# Allegro board autohood_teamschematic_v3.4.brd
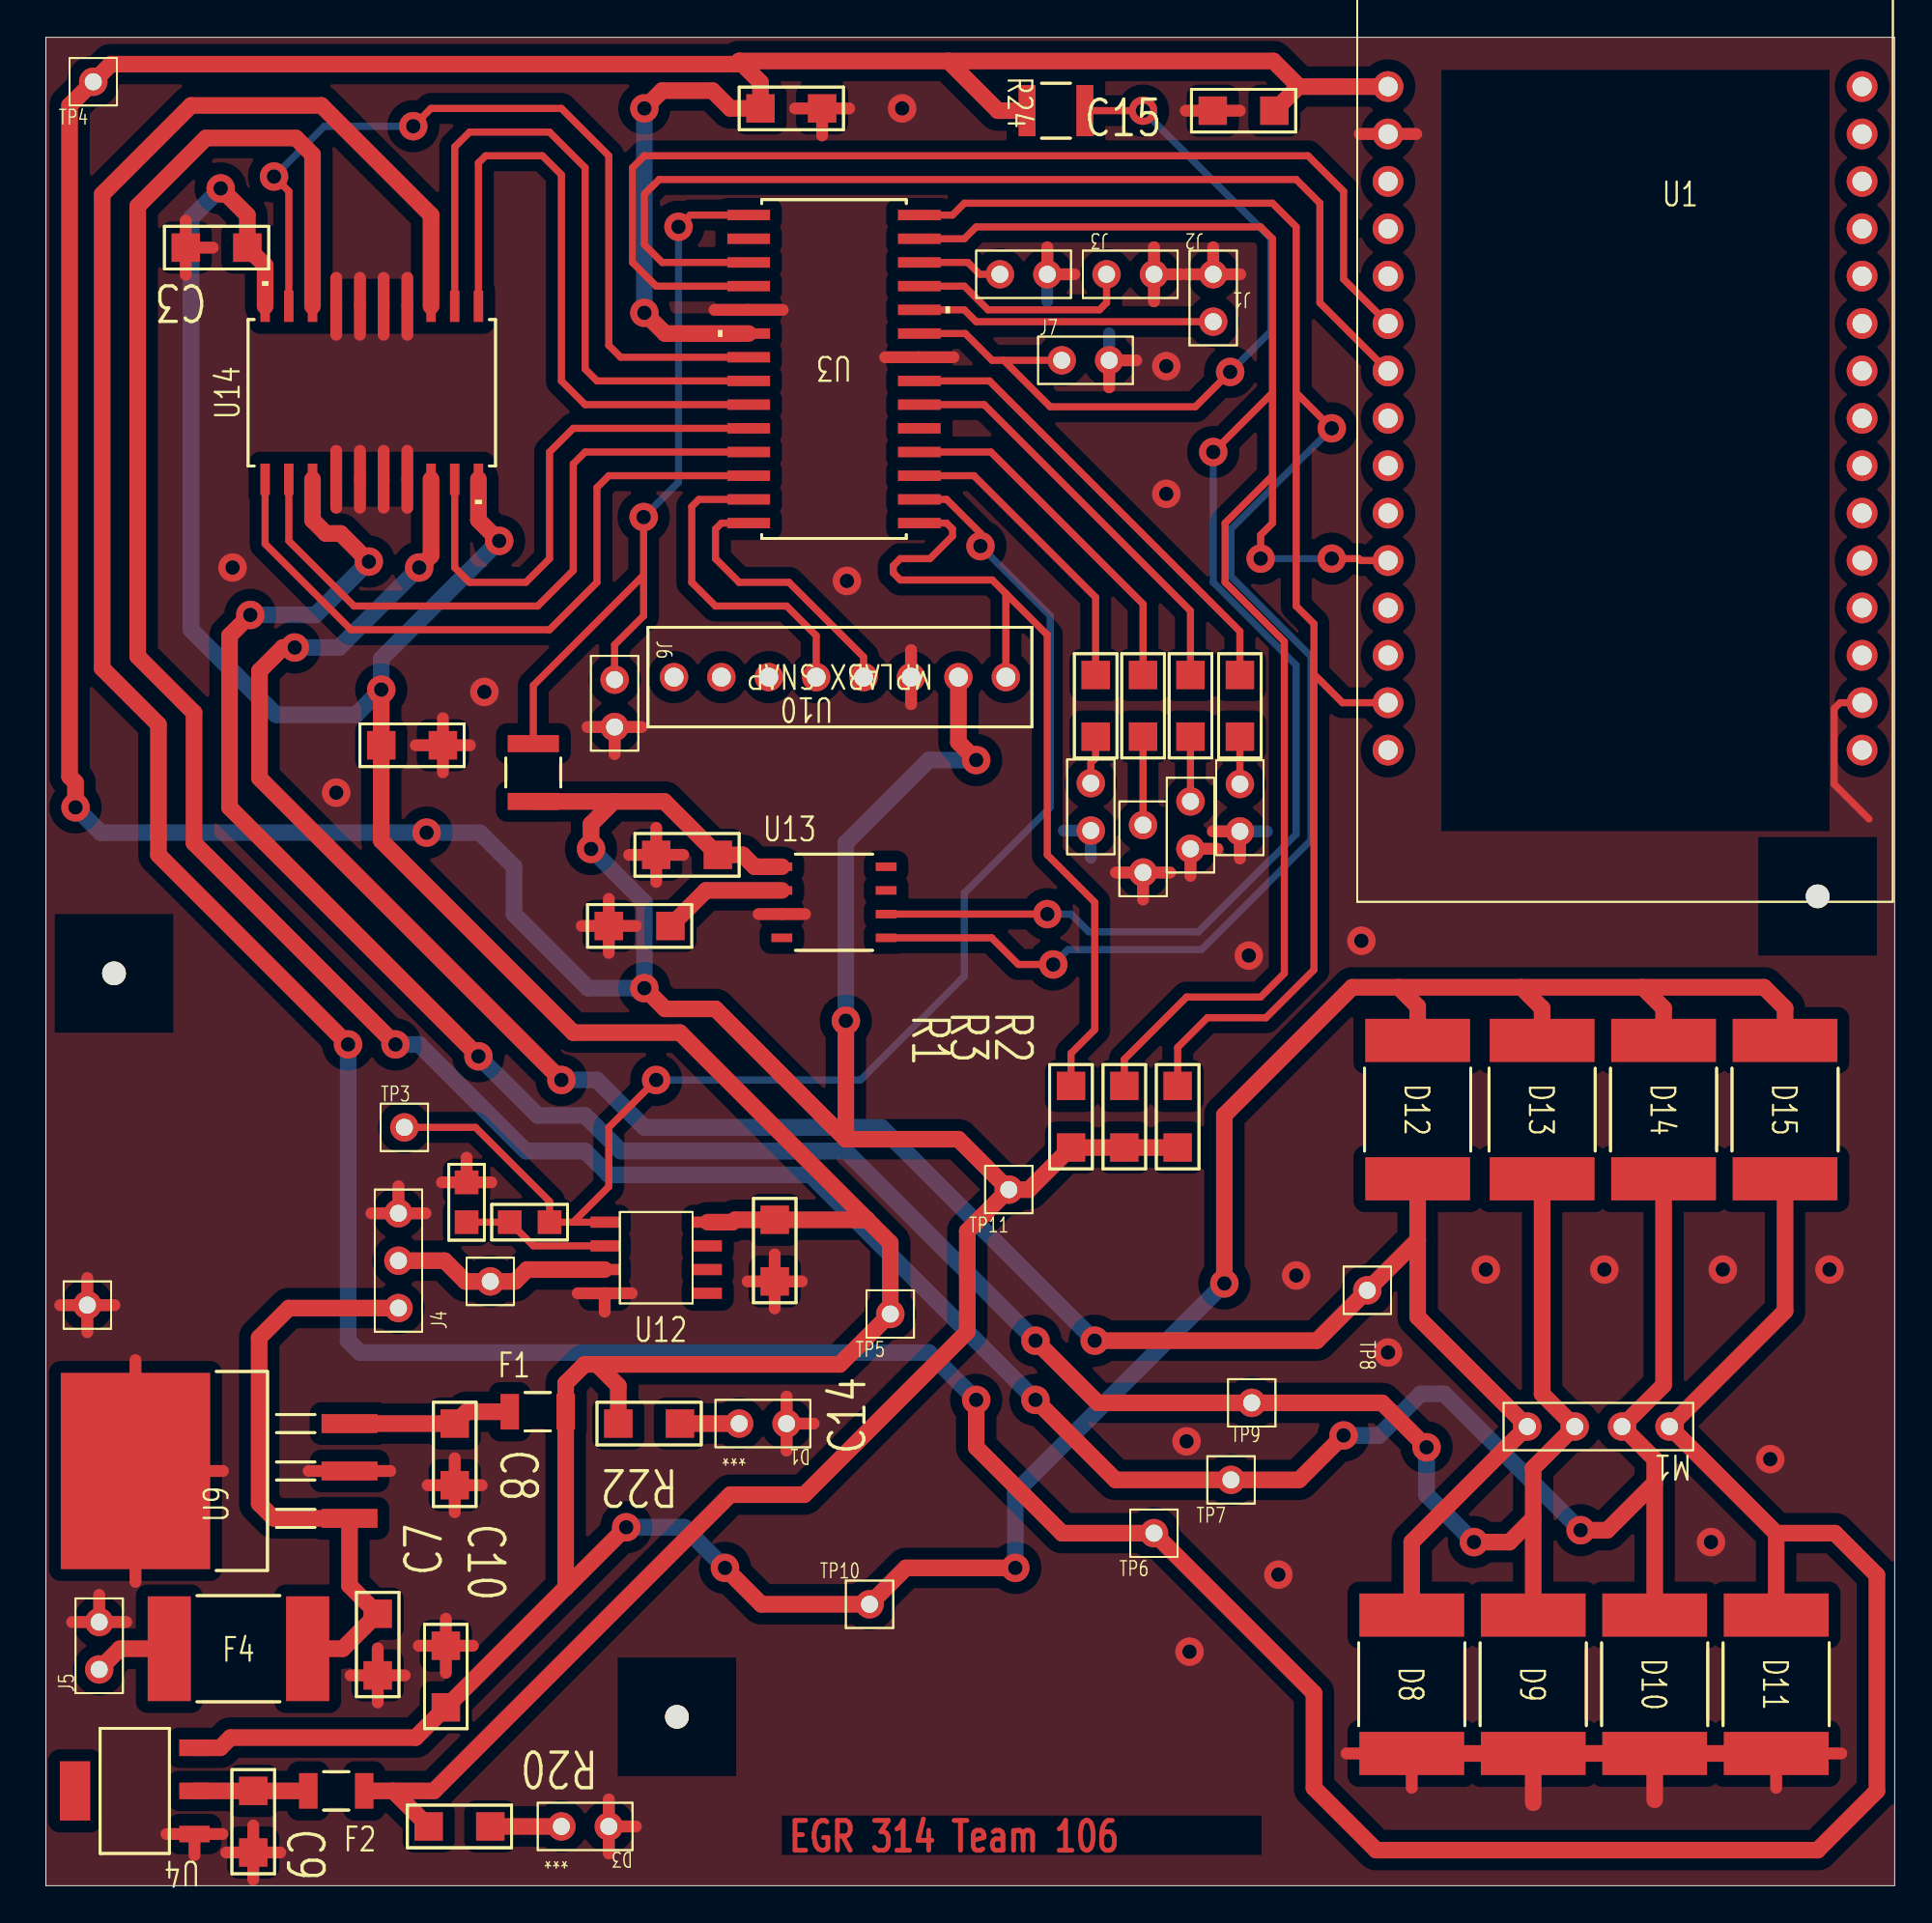
[diagram p0: board, top side]
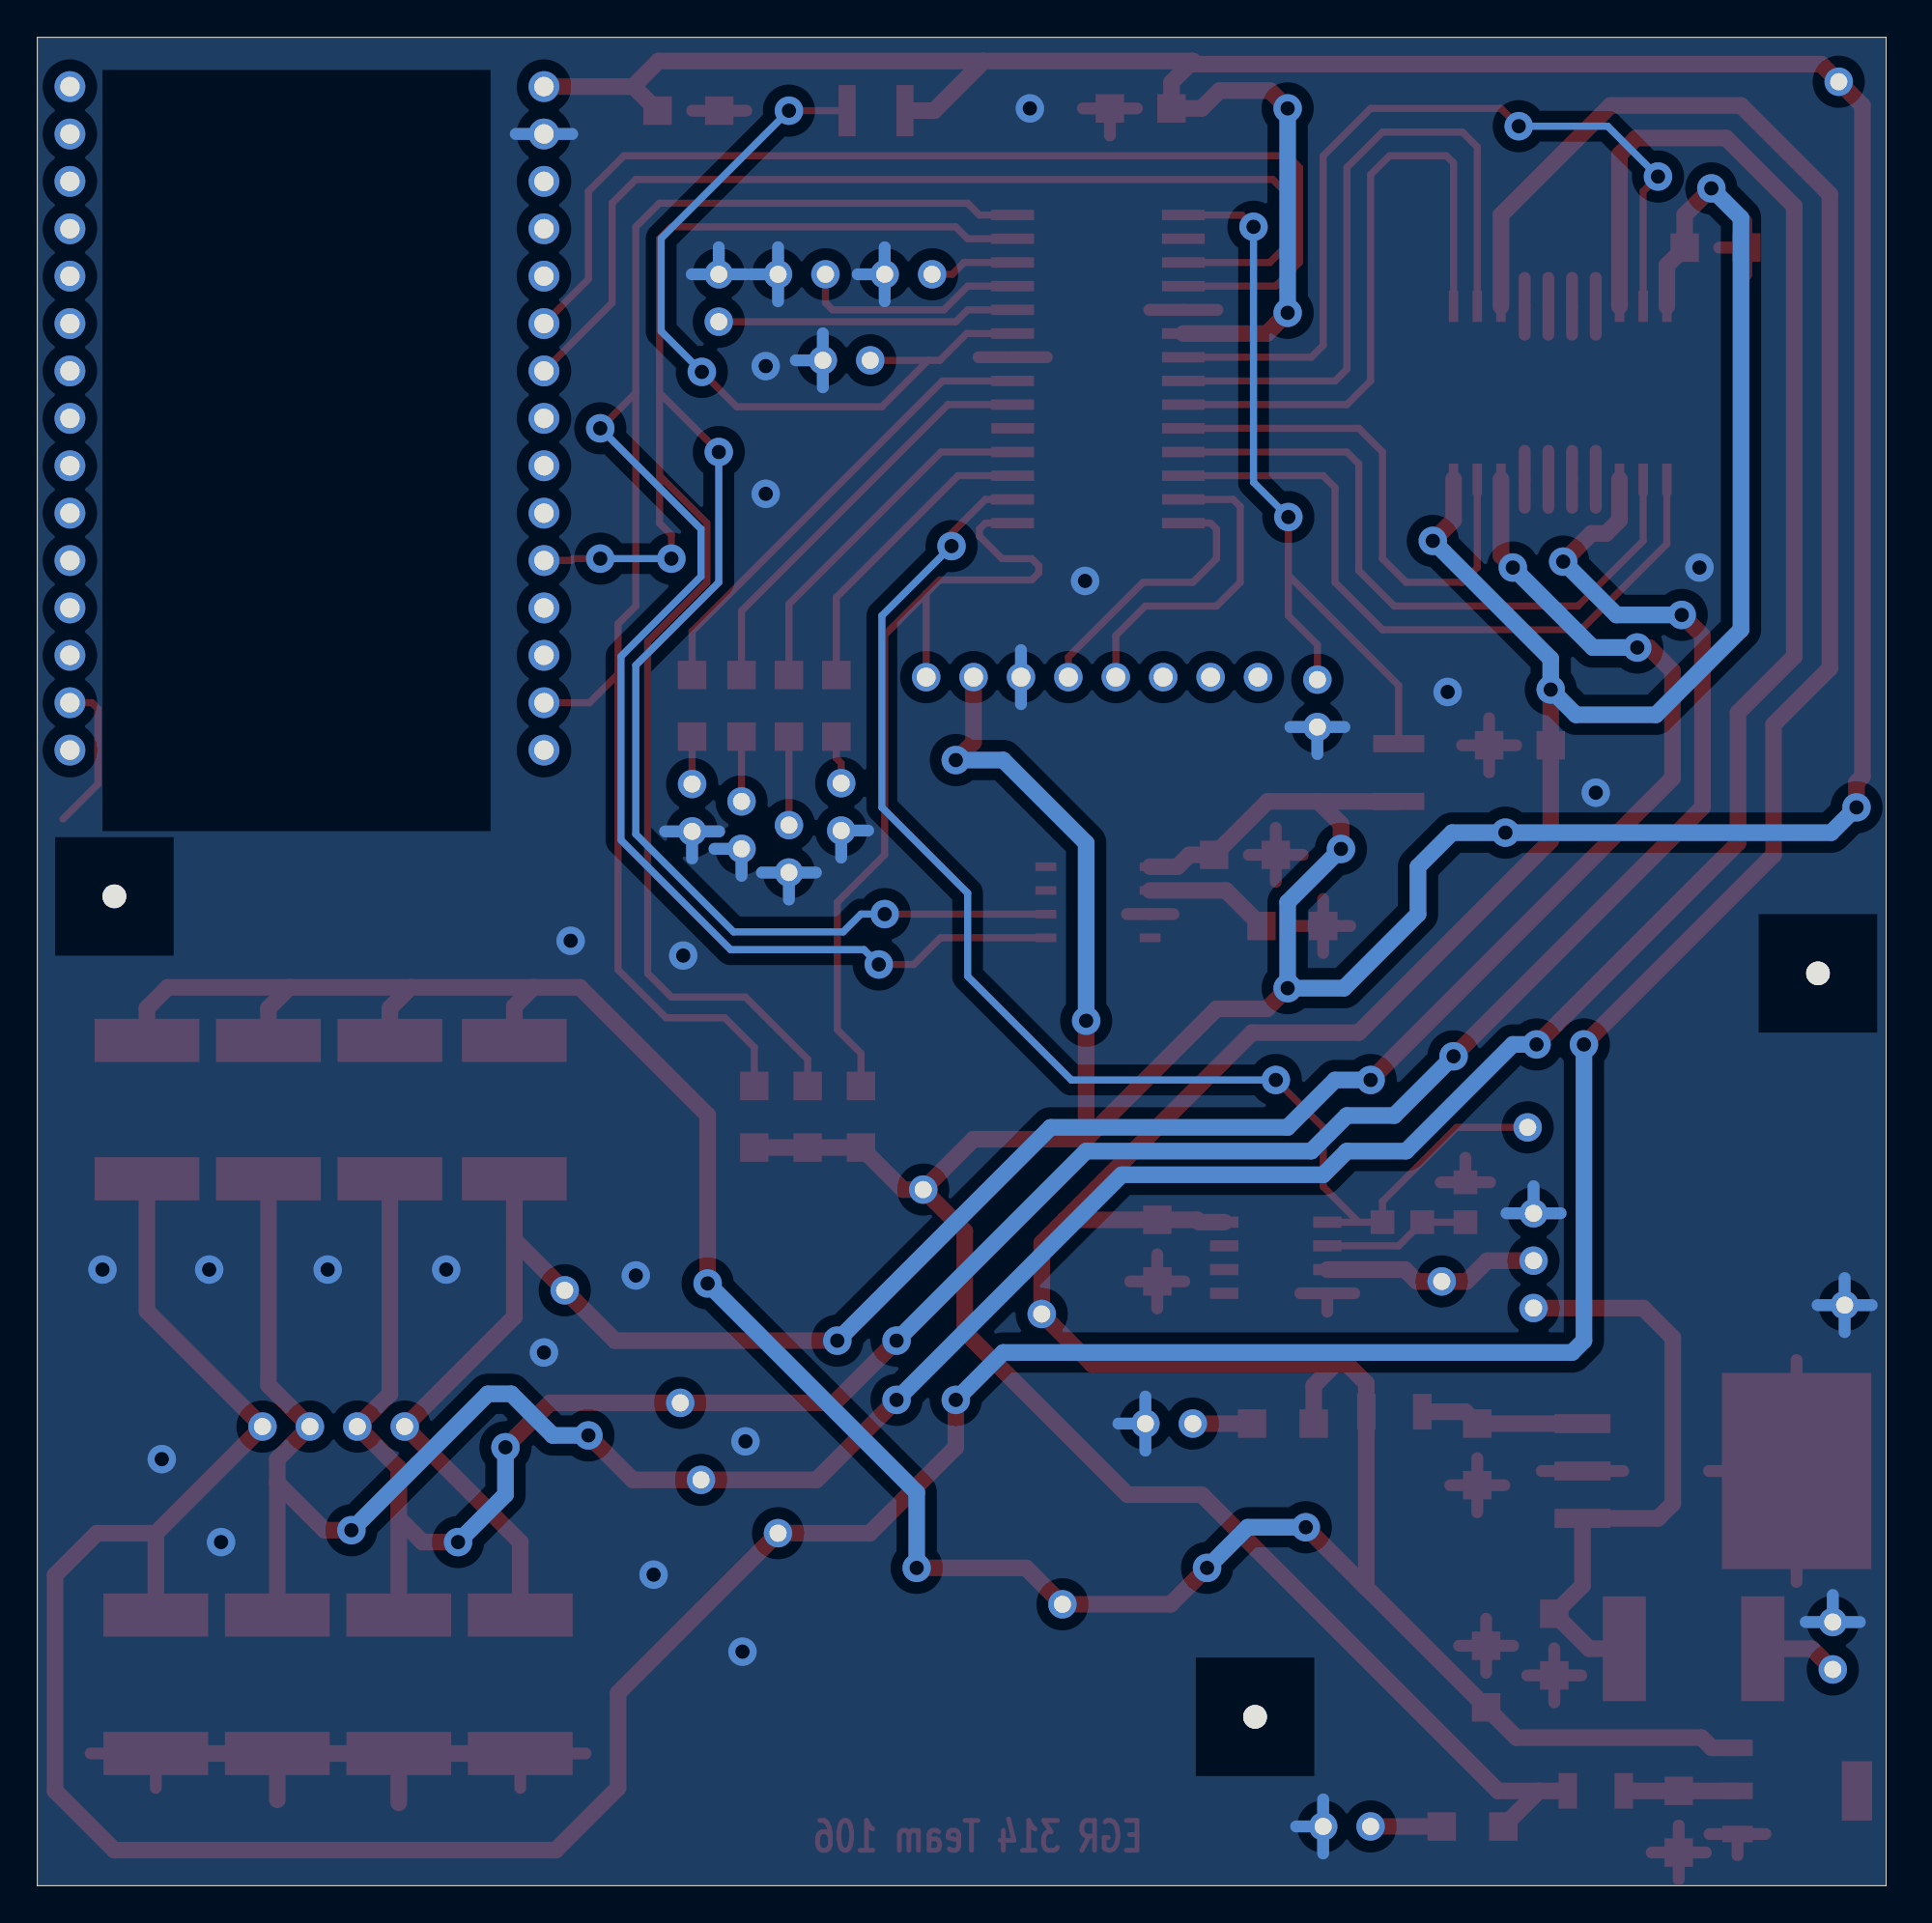
[diagram p1: board, bottom side, seen from below]

Outline 99.06 x 99.06 mm; copper layers: TOP, BOTTOM. Coordinates in mm from the lower left corner of the outline.
Outline path: 0,99.06 0,0 99.06,0 99.06,99.06 0,99.06

## Design rules (mm)
constraint set DEFAULT: min track width 0.127

## Placement (name value [footprint] x y rotation side)
C1  1 uF  [SMC1206]  41.59 95.25 180 top
C3  1 uF  [SMC1206]  10.8 87.79 180 top
C4  1 uF  [SMC1206]  21.27 61.12 180 top
C7  1 uF  [SMC1206]  17.78 11.27 90 top
C8  1 uF  [SMC1206]  21.91 24.76 270 top
C9  1 uF  [SMC1206]  11.11 5.08 270 top
C10  1 uF  [SMC1206]  21.43 12.86 270 top
C12  0.1uF  [SMC1206]  30.16 51.43 0 top
C13  0.22uF  [SMC1206]  32.7 55.24 0 top
C14  1 uF  [SMC1206]  39.05 32.38 90 top
C15  1 uF  [SMC1206]  62.52 95.13 0 top
D1  LED  [JUMPER2]  39.69 24.76 180 top
D2  LED  [JUMPER2]  61.33 55.57 90 top
D3  LED  [JUMPER2]  30.16 3.17 180 top
D4  LED  [JUMPER2]  63.98 56.5 90 top
D5  LED  [JUMPER2]  55.99 56.55 90 top
D7  LED  [JUMPER2]  58.79 54.3 90 top
D8  DIODE  [0ZCF_BEL]  73.18 10.79 270 top
D9  DIODE  [0ZCF_BEL]  79.69 10.79 270 top
D10  DIODE  [0ZCF_BEL]  86.2 10.79 270 top
D11  DIODE  [0ZCF_BEL]  92.71 10.79 270 top
D12  DIODE  [0ZCF_BEL]  73.5 41.59 270 top
D13  DIODE  [0ZCF_BEL]  80.17 41.59 270 top
D14  DIODE  [0ZCF_BEL]  86.68 41.59 270 top
D15  DIODE  [0ZCF_BEL]  93.19 41.59 270 top
F1  1.5A PTC Fuse  [0ZCJ_BEL]  26.35 25.4 0 top
F2  1.5A PTC Fuse  [0ZCJ_BEL]  15.56 5.08 0 top
F4  2.5A PTC Fuse  [0ZCF_BEL]  10.32 12.7 0 top
J1  CON2  [JUMPER2]  62.55 86.36 270 top
J2  CON2  [JUMPER2]  59.37 86.36 180 top
J3  CON2  [JUMPER2]  53.66 86.36 180 top
J4  CON3  [JUMPER3]  18.89 30.96 90 top
J5  CON2  [JUMPER2]  2.86 11.59 90 top
J6  Header to E-Button  [JUMPER2]  30.47 64.64 270 top
J7  Header to E-Button  [JUMPER2]  54.43 81.75 0 top
M1  42M100B  [JUMPER4]  87 24.61 180 top
NOREF  -  [unnamed]  3.65 48.89 0 top
NOREF#2  -  [unnamed]  33.81 9.05 0 top
NOREF#3  -  [unnamed]  94.93 53.02 0 top
R1  10k Ohm  [SMC1206]  54.93 42.86 270 top
R2  4.7k Ohm  [SMC1206]  60.64 42.86 270 top
R3  4.7k Ohm  [SMC1206]  57.79 42.86 270 top
R10  220 Ohm  [SMC1206]  56.25 61.58 90 top
R11  100 Ohm  [SMC0805]  26.99 35.56 180 top
R12  51.1 Ohm  [SMC0805]  22.54 35.56 90 top
R17  220 Ohm  [SMC1206]  58.79 61.58 90 top
R18  220 Ohm  [SMC1206]  63.98 61.58 90 top
R19  220 Ohm  [SMC1206]  61.33 61.58 90 top
R20  220 Ohm  [SMC1206]  23.81 3.17 180 top
R22  220 Ohm  [SMC1206]  33.97 24.76 180 top
R23  10k Ohm  [RES_RN73R2E_KOA-M]  26.12 59.66 90 top
R24  10k Ohm  [RES_RN73R2E_KOA-M]  54.12 95.13 0 top
TP1  TEST POINT  [JUMPER1]  2.22 31.11 0 top
TP2  TEST POINT  [JUMPER1]  23.81 32.38 0 top
TP3  TEST POINT  [JUMPER1]  19.21 40.64 0 top
TP4  TEST POINT  [JUMPER1]  2.54 96.68 0 top
TP5  TEST POINT  [JUMPER1]  45.24 30.64 0 top
TP6  TEST POINT  [JUMPER1]  59.37 18.89 0 top
TP7  TEST POINT  [JUMPER1]  63.5 21.75 0 top
TP8  TEST POINT  [JUMPER1]  70.8 31.91 0 top
TP9  TEST POINT  [JUMPER1]  64.61 25.88 0 top
TP10  TEST POINT  [JUMPER1]  44.13 15.08 0 top
TP11  TEST POINT  [JUMPER1]  51.59 37.31 0 top
U1  ESP32 DEVKIT V1 - DOIT  [ESP32]  84.61 78.64 0 top
U3  PIC18LF26K40-E/SO  [SOIC28-W_MC_MCH-M]  42.23 81.28 180 top
U4  ADP3339AKCZ-3-3-RL  [SOT230P700X180-4N]  4.76 5.08 180 top
U9  LM340T-5/LF01  [SOT_0T-5P0LF01_TEX-M]  7.3 22.22 90 top
U10  MPLABX SNAP  [CONN_PXC08D_SUL]  51.44 63.5 180 top
U12  NCS21911  [NCS21912DR2G]  32.7 33.65 0 top
U13  HIH6130  [IC8_HIH6130-021-001_HNW]  42.23 52.7 0 top
U14  L293DD  [L293DD013TR_SO-20_STM-L]  17.46 80.01 90 top

## Library data of the parts
C1 C3 C4 C7-C10 C12-C15 = C
D1 D3 = LED: User Part Number: ***
D2 D4 D5 D7 = LED
D8-D15 = DIODE: User Part Number: PN; Tolerance: TOL
F1 F2 = FUSE THERMAL
F4 = FUSE THERMAL: User Part Number: PN; Tolerance: TOL
J1-J3 = CON2
J4 = CON3
J5 = CON2: User Part Number: ***
J6 J7 = HEADER 2
M1 = 42M100B
R1-R3 R10-R12 R17-R20 R22 = R
R23 = RESISTOR
R24 = RESISTOR: User Part Number: PN; Tolerance: TOL
TP1-TP11 = TEST POINT
U1 = ESP32 DEVKIT V1 - DOIT
U3 = PIC18F26K40-E/SO: User Part Number: PN; Tolerance: TOL
U4 = ADP3339AKCZ
U9 = LM340T-5-LF01: User Part Number: PN; Tolerance: TOL
U10 = SNAP_CONNECTOR: User Part Number: PN; Tolerance: TOL
U12 = NCS21911
U13 = HIH6130
U14 = L293DD013TR

## Footprints (pads in the part's own frame, mm; a bottom-side part is the same pattern mirrored in y, then rotated)
0ZCF_BEL
  rect 2.311x5.613 smd: 1(-3.708,0) 2(3.708,0)
0ZCJ_BEL
  rect 0.991x1.905 smd: 1(-1.499,0) 2(1.499,0)
CONN_PXC08D_SUL
  round 1.524 hole 1.016: 1(0,-1.27) 2(2.54,-1.27) 3(5.08,-1.27) 4(7.62,-1.27) 5(10.16,-1.27) 6(12.7,-1.27) 7(15.24,-1.27) 8(17.78,-1.27)
ESP32
  round 1.651 hole 1.041: 1(-12.7,17.78) 2(-12.7,15.24) 3(-12.7,12.7) 4(-12.7,10.16) 5(-12.7,7.62) 6(-12.7,5.08) 7(-12.7,2.54) 8(-12.7,0) 9(-12.7,-2.54) 10(-12.7,-5.08) 11(-12.7,-7.62) 12(-12.7,-10.16) 13(-12.7,-12.7) 14(-12.7,-15.24) 15(-12.7,-17.78) 16(12.7,17.78) 17(12.7,-15.24) 18(12.7,-12.7) 19(12.7,-10.16) 20(12.7,-7.62) 21(12.7,-5.08) 22(12.7,-2.54) 23(12.7,0) 24(12.7,2.54) 25(12.7,5.08) 26(12.7,7.62) 27(12.7,10.16) 28(12.7,12.7) 29(12.7,15.24) 30(12.7,-17.78)
IC8_HIH6130-021-001_HNW
  rect 1.118x0.457 smd: 1(-2.794,1.905) 2(-2.794,0.635) 3(-2.794,-0.635) 4(-2.794,-1.905) 5(2.794,-1.905) 6(2.794,-0.635) 7(2.794,0.635) 8(2.794,1.905)
JUMPER1
  round 1.524 hole 0.914: 1(0,0)
JUMPER2
  round 1.524 hole 0.914: 1(0,0) 2(2.54,0)
JUMPER3
  round 1.524 hole 0.914: 1(0,0) 2(2.54,0) 3(5.08,0)
JUMPER4
  round 1.524 hole 0.914: 1(0,0) 2(2.54,0) 3(5.08,0) 4(7.62,0)
L293DD013TR_SO-20_STM-L
  rect 1.676x0.508 smd: 1(-4.636,5.715) 2(-4.636,4.445) 3(-4.636,3.175) 4(-4.636,1.905) 5(-4.636,0.635) 6(-4.636,-0.635) 7(-4.636,-1.905) 8(-4.636,-3.175) 9(-4.636,-4.445) 10(-4.636,-5.715) 11(4.636,-5.715) 12(4.636,-4.445) 13(4.636,-3.175) 14(4.636,-1.905) 15(4.636,-0.635) 16(4.636,0.635) 17(4.636,1.905) 18(4.636,3.175) 19(4.636,4.445) 20(4.636,5.715)
NCS21912DR2G
  rect 1.52x0.6 smd: 1(-2.76,1.905) 2(-2.76,0.635) 3(-2.76,-0.635) 4(-2.76,-1.905) 5(2.76,-1.905) 6(2.76,-0.635) 7(2.76,0.635) 8(2.76,1.905)
RES_RN73R2E_KOA-M
  rect 0.914x2.743 smd: 1(-1.549,0) 2(1.549,0)
SMC0805
  rect 1.27x1.27 smd: 1(0,0) 2(2.134,0)
SMC1206
  rect 1.524x1.524 smd: 1(0,0) 2(3.302,0)
SOIC28-W_MC_MCH-M
  rect 2.286x0.559 smd: 1(-4.572,8.255) 2(-4.572,6.985) 3(-4.572,5.715) 4(-4.572,4.445) 5(-4.572,3.175) 6(-4.572,1.905) 7(-4.572,0.635) 8(-4.572,-0.635) 9(-4.572,-1.905) 10(-4.572,-3.175) 11(-4.572,-4.445) 12(-4.572,-5.715) 13(-4.572,-6.985) 14(-4.572,-8.255) 15(4.572,-8.255) 16(4.572,-6.985) 17(4.572,-5.715) 18(4.572,-4.445) 19(4.572,-3.175) 20(4.572,-1.905) 21(4.572,-0.635) 22(4.572,0.635) 23(4.572,1.905) 24(4.572,3.175) 25(4.572,4.445) 26(4.572,5.715) 27(4.572,6.985) 28(4.572,8.255)
SOT230P700X180-4N
  rect 1.626x0.889 smd: 1(-3.2,2.311) 2(-3.2,0) 3(-3.2,-2.311)
  rect 1.626x3.175 smd: 4(3.2,0)
SOT_0T-5P0LF01_TEX-M
  rect 1.016x2.997 smd: 1(-2.54,-8.966) 2(0,-8.966) 3(2.54,-8.966)
  rect 10.516x8.001 smd: 4(0,2.502)
unnamed
  round 1.27 hole 3.962 unplated: (0,0)

## Nets
3V3: C1.2 C13.2 C15.2 F2.2 R1.2 R2.2 R3.2 R20.2 R23.1 R24.1 TP4.1 TP11.1 U1.1 U3.20 U10.2(VDD) U13.1
3V3_FUSE: C9.1 F2.1 U4.2(OUT1)
5V: C3.1 C4.2 C10.2 C14.2 D12.1(K) D13.1(K) D14.1(K) D15.1(K) F1.2 R22.2 TP5.1 TP10.1 U4.3 U12.8 U14.10 U14.20(VSS)
5V_FUSE: C8.1 F1.1 U9.3(OUT)
9V: C7.2 F4.2 J4.1 U9.1
GND: C1.1 C3.2 C4.1 C7.1 C8.2 C9.2 C10.1 C12.1 C13.1 C14.1 C15.1 D1.1(CATHODE) D2.1(CATHODE) D3.1(CATHODE) D4.1(CATHODE) D5.1(CATHODE) D7.1(CATHODE) D8.2 D9.2 D10.2 D11.2 J1.1 J2.1 J3.1 J4.3 J5.2 J6.2 J7.2 R12.2 TP1.1 U1.2 U1.17 U3.8 U3.19(VSS1) U4.1 U9.2 U9.4 U10.3 U12.4(VSS) U13.3(VSS) U14.4 U14.5 U14.6 U14.7 U14.14 U14.15 U14.16 U14.17
AMP: R11.1 TP3.1 U3.2 U12.1
ANEM: J4.2 TP2.1 U12.3
ANEM_LED: R10.2 U3.3
BTN_1: J7.1 R24.2 U3.9
COIL_1_IN: D9.1(K) D13.2 M1.3 TP9.1 U14.3
COIL_1_OUT: D8.1(K) D12.2 M1.4(OUT_2) TP8.1 U14.8
COIL_2_IN: D11.1(K) D15.2 M1.1 TP6.1 U14.13
COIL_2_OUT: D10.1(K) D14.2 M1.2 TP7.1 U14.18
E-BUTTON: J6.1 R23.2 U3.15
ENABLEA: U3.26 U14.1
ENABLEB: U3.23 U14.11
ESP32RX: U1.6 U3.18
ESP32TX: U1.7 U3.17
HUMIDITY_LED: R17.2 U3.4
INPUT1A: U3.25 U14.2
INPUT1B: U3.22 U14.12
INPUT2A: U3.24 U14.9
INPUT2B: U3.21 U14.19
LED: R18.2 U3.7
MCLR: R1.1 U3.1 U10.1
PGC: U3.27 U10.5
PGD: U3.28 U10.4
SCL: R2.1 U1.14 U3.14 U13.5
SDA: R3.1 U1.11 U3.13 U13.6
STEP_LED: R19.2 U3.6
XTRAGPIO: J1.2 U3.10
XTRAGPIO1: J2.2 U3.11
XTRAGPIO2: J3.2 U3.12
N05422: D2.2 R19.1
N05426: D3.2 R20.1
N06741: D4.2 R18.1
N07629: F4.1 J5.1
N08087: D5.2 R10.1
N08305: R11.2 R12.1 U12.2
N08985: C12.2 U13.2
N09403: D7.2 R17.1
N39972: D1.2 R22.1

Pads without a net: U1 3 4 5 8 9 10 12 13 15 16 18 19 20 21 22 23 24 25 26 27 28 29 30; U3 5 16; U4 4; U10 6 7 8; U12 5 6 7; U13 4 7 8

## Via types
v1: diameter 1.524, hole 0.775, TOP to BOTTOM, 65 vias

## Routing (per net, layer and track width the routed paths; a pad name or vN(x,y) marks a point on that pad's centre or on a via; arc(x,y) is an arc through that point)
3V3: length 323.8
  TOP w0.889: 30.42,58.11 33.14,58.11 C13.2 37.34,55.24 37.97,54.61 39.43,54.61 ; 30.42,58.11 29.21,56.9 v1(29.21,55.56) ; 30.42,58.11 R23.1 ; U10.2 48.89,61.28 v1(49.85,60.32) ; 18.61,5.08 F2.2 ; 18.61,5.08 R20.2 ; 18.61,5.08 20.8,5.08 36.67,20.95 40.64,20.95 49.37,29.69 49.37,35.08 TP11.1 ; U1.1 67.11,96.42 ; 67.11,96.42 C15.2 ; 67.11,96.42 67.11,96.45 65.77,97.79 48.35,97.79 ; TP11.1 52.67,37.31 R1.2 R3.2 R2.2 ; TP11.1 48.89,40 42.86,40 ; 48.35,97.79 37.15,97.79 ; 48.35,97.79 51.01,95.13 R24.1 ; 37.15,97.79 36.98,97.62 3.48,97.62 TP4.1 1.27,95.41 1.27,59.44 1.59,59.12 v1(1.59,57.79) ; 37.15,97.79 38.29,96.65 C1.2 36.67,95.25 35.72,96.2 33.02,96.2 v1(32.07,95.25) ; 42.86,40 35.88,46.99 33.18,46.99 v1(32.07,48.1) ; 42.86,40 v1(42.86,46.35) ; v1(32.07,84.3) 33.18,83.18 U3.20
  BOTTOM w0.889: v1(42.86,46.35) 42.86,55.88 47.31,60.32 v1(49.85,60.32) ; v1(32.07,95.25) v1(32.07,84.3) ; v1(29.21,55.56) 32.07,52.7 v1(32.07,48.1) 29.05,48.1 25.08,52.07 25.08,54.61 23.26,56.44 v1(20.4,56.44) 2.94,56.44 v1(1.59,57.79)
3V3_FUSE: length 6.1
  TOP w0.889: F2.1 C9.1 U4.2
5V: length 274.1
  TOP w0.889: U4.3 9.35,7.39 9.89,7.94 19.81,7.94 C10.2 27.85,15.98 ; 85.56,48.15 86.68,47.03 D14.1 ; 85.56,48.15 79.05,48.15 ; 85.56,48.15 92.07,48.15 93.19,47.03 D15.1 ; 72.48,48.15 73.5,47.12 D12.1 ; 72.48,48.15 79.05,48.15 ; 72.48,48.15 69.99,48.15 63.14,41.3 v1(63.14,32.28) ; v1(36.39,17.03) 38.33,15.08 TP10.1 46.08,17.03 v1(51.94,17.03) ; D13.1 80.17,47.03 79.05,48.15 ; 44.01,35.69 45.24,34.45 TP5.1 42.55,27.94 29.53,27.94 ; 44.01,35.69 C14.2 36.92,35.69 36.79,35.56 U12.8 ; 44.01,35.69 33.97,45.72 28.26,45.72 17.97,56.01 C4.2 v1(17.97,64.1) ; v1(9.37,90.96) 10.8,89.53 C3.1 11.75,86.84 U14.20 ; R22.2 30.67,26.8 29.53,27.94 ; 27.85,15.98 27.86,15.98 v1(31.1,19.21) ; 27.85,15.98 F1.2 27.85,26.92 28.87,27.94 29.53,27.94 ; U14.10 23.18,73.18 v1(24.29,72.07)
  BOTTOM w0.889: v1(24.29,72.07) 17.97,65.75 v1(17.97,64.1) 16.62,62.75 12.34,62.75 7.78,67.31 7.78,89.38 v1(9.37,90.96) ; v1(51.94,17.03) 51.94,21.08 v1(63.14,32.28) ; v1(31.1,19.21) 34.21,19.21 v1(36.39,17.03)
5V_FUSE: length 8.8
  TOP w0.889: F1.1 22.54,25.4 C8.1 U9.3
9V: length 32.4
  TOP w0.889: F4.2 15.91,12.7 C7.2 16.27,16.08 U9.1 12.22,19.68 11.43,20.48 11.43,29.37 13.02,30.96 J4.1
GND: length 292
  TOP w0.381: U1.17 96.13,63.4 95.82,63.08 95.82,59.04 97.68,57.17
  TOP w0.635: 28.5,31.75 U12.4 ; U12.4 29.94,30.76 ; U12.4 31.39,31.75 ; 19.82,61.12 C4.1 ; C4.1 22.72,61.12 ; C4.1 21.27,59.67 ; C4.1 21.27,62.57 ; 15.56,73.85 U14.4 15.56,76.9 ; 17.78,9.82 C7.1 ; C7.1 17.78,12.72 ; C7.1 16.33,11.27 ; C7.1 19.23,11.27 ; 40.14,95.25 C1.1 ; C1.1 41.59,93.8 ; C1.1 43.04,95.25 ; 30.16,1.73 D3.1 ; D3.1 31.61,3.17 ; D3.1 30.16,4.62 ; 59.37,84.91 J2.1 ; J2.1 60.82,86.36 ; J2.1 59.37,87.81 ; 29.03,62.1 J6.2 ; J6.2 31.92,62.1 ; J6.2 30.47,60.65 ; 16.83,76.9 U14.5 16.83,73.85 ; 15.56,86.17 U14.17 15.56,83.12 ; 32.7,53.8 C13.1 ; C13.1 31.25,55.24 ; C13.1 34.15,55.24 ; C13.1 32.7,56.69 ; 28.71,51.43 C12.1 ; C12.1 30.16,49.99 ; C12.1 31.61,51.43 ; C12.1 30.16,52.88 ; 48.63,81.91 U3.8 44.97,81.91 ; 21.43,11.41 C10.1 ; C10.1 19.98,12.86 ; C10.1 22.88,12.86 ; C10.1 21.43,14.31 ; 19.37,76.9 U14.7 19.37,73.85 ; U9.4 9.49,22.22 ; U9.4 4.8,28.17 ; U9.4 4.8,16.28 ; 7.96,1.64 U4.1 ; U4.1 6.46,2.77 ; U4.1 9.46,2.77 ; 18.1,76.9 U14.6 18.1,73.85 ; 11.11,0.33 C9.2 ; C9.2 9.66,1.78 ; C9.2 11.11,3.23 ; C9.2 12.56,1.78 ; 19.37,86.17 U14.14 19.37,83.12 ; C14.1 40.5,32.38 ; C14.1 39.05,30.94 ; C14.1 39.05,33.83 ; C14.1 37.6,32.38 ; J4.3 20.34,36.04 ; J4.3 18.89,37.48 ; J4.3 17.44,36.04 ; 18.45,22.22 U9.2 14.08,22.22 ; 62.53,56.5 D4.1 63.98,55.05 ; 38.19,52.07 40.68,52.07 ; 7.49,86.34 C3.2 ; C3.2 8.94,87.79 ; C3.2 7.49,89.24 ; 39.48,84.45 U3.19 35.83,84.45 ; TP1.1 3.67,31.11 ; TP1.1 0.77,31.11 ; TP1.1 2.22,32.56 ; TP1.1 2.22,29.67 ; 46.36,63.32 U10.3 46.36,66.22 ; 16.83,83.12 U14.16 16.83,86.17 ; 58.79,52.85 D7.1 ; D7.1 60.24,54.3 ; D7.1 57.34,54.3 ; J5.2 4.31,14.13 ; J5.2 1.41,14.13 ; J5.2 2.86,15.58 ; R12.2 23.86,37.69 ; R12.2 22.54,39.01 ; R12.2 21.22,37.69 ; 96.2,7.09 D11.2 92.71,5.24 ; 58.42,81.75 J7.2 56.97,80.3 ; 55.11,86.36 J3.1 53.66,87.81 ; 39.69,23.32 D1.1 ; D1.1 41.14,24.76 ; D1.1 39.69,26.21 ; 73.43,93.88 U1.2 70.4,93.88 ; 21.91,20.01 C8.2 ; C8.2 21.91,22.91 ; C8.2 23.36,21.46 ; C8.2 20.46,21.46 ; 18.1,86.17 U14.15 18.1,83.12 ; 73.18,5.24 D8.2 69.69,7.09 ; 61.1,86.36 J1.1 ; J1.1 62.55,87.81 ; J1.1 64,86.36 ; 61.33,54.12 D2.1 62.78,55.57 ; 63.97,95.13 C15.1 61.07,95.13
  TOP w0.889: D9.2 79.69,4.44 ; D9.2 D10.2 ; D9.2 D8.2 ; D10.2 D11.2 ; D10.2 86.2,4.6
  BOTTOM w0.635: J3.1 53.66,87.81 ; J3.1 55.11,86.36 ; J3.1 53.66,84.91 ; J7.2 58.42,81.75 ; J7.2 56.97,83.2 ; J7.2 56.97,80.3 ; 62.53,56.5 D4.1 ; D4.1 63.98,55.05 ; D4.1 65.42,56.5 ; J2.1 60.82,86.36 ; J2.1 59.37,87.81 ; J2.1 59.37,84.91 ; 30.16,1.73 D3.1 ; D3.1 30.16,4.62 ; D3.1 31.61,3.17 ; 1.41,14.13 J5.2 ; J5.2 2.86,15.58 ; J5.2 4.31,14.13 ; 57.34,54.3 D7.1 ; D7.1 60.24,54.3 ; D7.1 58.79,52.85 ; TP1.1 3.67,31.11 ; TP1.1 2.22,29.67 ; TP1.1 0.77,31.11 ; TP1.1 2.22,32.56 ; 46.36,66.22 U10.3 46.36,63.32 ; J4.3 18.89,37.48 ; J4.3 20.34,36.04 ; J4.3 17.44,36.04 ; J1.1 62.55,87.81 ; J1.1 61.1,86.36 ; J1.1 64,86.36 ; 62.78,55.57 D2.1 61.33,54.12 ; 39.69,23.32 D1.1 ; D1.1 41.14,24.76 ; D1.1 39.69,26.21 ; 30.47,60.65 J6.2 ; J6.2 31.92,62.1 ; J6.2 29.03,62.1 ; 54.54,56.55 D5.1 55.99,55.1 ; 70.4,93.88 U1.2 73.43,93.88
  vias: v1(10,70.64) v1(15.56,58.58) v1(23.5,63.98) v1(42.92,69.93) v1(45.88,95.25) v1(60.03,81.44) v1(60.03,74.59) v1(61.12,23.81) v1(61.28,12.54) v1(64.45,49.85) v1(66.04,16.67) v1(66.99,32.7) v1(70.49,50.64) v1(71.91,28.57) v1(77.15,33.02) v1(83.5,33.02) v1(89.22,18.41) v1(89.85,33.02) v1(92.39,22.86) v1(95.57,33.02)
AMP: length 73
  TOP w0.381: 28.26,35.56 R11.1 26.99,36.67 23.02,40.64 TP3.1 ; 28.26,35.56 U12.1 ; 28.26,35.56 30.16,37.46 30.16,40.64 v1(32.7,43.18) ; U3.2 48.26,74.29 50.08,72.48 v1(50.08,71.79)
  BOTTOM w0.381: v1(50.08,71.79) 53.81,68.06 53.81,57.79 49.21,53.19 49.21,48.74 43.66,43.18 v1(32.7,43.18)
ANEM: length 11.8
  TOP w0.889: U12.3 25.78,33.02 25.15,32.38 TP2.1 22.48,32.38 21.37,33.5 J4.2
ANEM_LED: length 16.3
  TOP w0.381: R10.2 56.25,69.04 49.73,75.56 U3.3
BTN_1: length 43
  TOP w0.381: R24.2 v1(58.79,95.13) ; 51.32,81.75 J7.1 ; 51.32,81.75 53.81,79.26 61.59,79.26 v1(63.46,81.13) ; 51.32,81.75 50.7,81.75 49.26,83.18 U3.9
  BOTTOM w0.381: v1(63.46,81.13) 65.63,83.31 65.63,88.28 v1(58.79,95.13)
COIL_1_IN: length 137.6
  TOP w0.889: v1(53.02,29.21) 56.36,25.88 TP9.1 71.6,25.88 v1(73.98,23.49) ; 79.69,19.68 79.69,22.38 M1.3 80.17,26.35 D13.2 ; 79.69,19.68 D9.1 ; 79.69,19.68 78.42,18.41 v1(76.52,18.41) ; U14.3 14.29,73.18 15,72.47 15.8,72.47 v1(17.3,70.96) ; v1(10.95,68.1) 9.84,66.99 9.84,57.78 v1(23.18,44.45)
  BOTTOM w0.889: v1(76.52,18.41) 73.98,20.95 v1(73.98,23.49) ; v1(10.95,68.1) 14.45,68.1 v1(17.3,70.96) ; v1(53.02,29.21) 42.86,39.37 30.8,39.37 28.89,41.27 26.35,41.27 v1(23.18,44.45)
COIL_1_OUT: length 126.7
  TOP w0.889: v1(27.62,43.18) 11.45,59.35 11.45,65.11 12.7,66.36 v1(13.34,66.36) ; D12.2 73.5,34.61 ; 73.5,34.61 TP8.1 68.1,29.21 v1(56.2,29.21) ; 73.5,34.61 73.5,30.48 M1.4 73.18,18.41 D8.1 ; v1(20,70.64) 20.64,71.28 U14.8
  BOTTOM w0.889: v1(13.34,66.36) 15.72,66.36 v1(20,70.64) ; v1(27.62,43.18) 29.53,43.18 32.07,40.64 44.77,40.64 v1(56.2,29.21)
COIL_2_IN: length 239
  TOP w0.889: v1(16.19,45.08) 6.03,55.24 6.03,62.23 3.02,65.25 3.02,90.65 7.78,95.41 14.76,95.41 20.64,89.53 U14.13 ; v1(49.85,26.03) 49.85,23.49 54.45,18.89 TP6.1 67.94,10.32 67.94,5.24 71.28,1.9 94.93,1.9 98.11,5.08 98.11,16.64 95.86,18.89 92.71,18.89 ; 92.71,18.89 M1.1 93.19,30.8 D15.2 ; 92.71,18.89 D11.1
  BOTTOM w0.889: v1(49.85,26.03) 47.31,28.57 16.83,28.57 16.19,29.21 v1(16.19,45.08)
COIL_2_OUT: length 178.2
  TOP w0.889: v1(82.23,19.05) 83.66,19.05 86.2,21.59 ; D14.2 86.68,26.83 M1.2 86.2,22.86 86.2,21.59 ; D10.1 86.2,21.59 ; U14.18 14.29,92.77 13.4,93.66 8.57,93.66 4.92,90.01 4.92,65.88 7.94,62.86 7.94,55.88 v1(18.73,45.08) ; v1(69.53,24.13) 67.15,21.75 TP7.1 57.31,21.75 v1(53.02,26.03)
  BOTTOM w0.889: v1(82.23,19.05) 74.92,26.36 73.67,26.36 71.44,24.13 v1(69.53,24.13) ; v1(53.02,26.03) 40.96,38.1 30.16,38.1 28.89,39.37 25.72,39.37 20,45.08 v1(18.73,45.08)
E-BUTTON: length 41.2
  TOP w0.381: 32.03,70.24 32.03,68.06 30.47,66.5 J6.1 ; 32.03,70.24 v1(32.03,73.35) ; 32.03,70.24 26.12,64.33 R23.2 ; v1(33.9,88.91) 34.52,89.53 U3.15
  BOTTOM w0.381: v1(32.03,73.35) 33.9,75.22 v1(33.9,88.91)
ENABLEA: length 37.7
  TOP w0.381: U14.1 11.75,71.91 16.35,67.31 26.99,67.31 29.53,69.85 29.53,74.93 30.16,75.56 U3.26
ENABLEB: length 34.3
  TOP w0.381: U14.11 23.18,92.33 23.56,92.71 26.61,92.71 27.62,91.69 27.62,80.64 28.89,79.38 U3.23
ESP32RX: length 59.1
  TOP w0.381: U1.6 69.53,86.1 69.53,90.8 67.63,92.71 32.07,92.71 31.43,92.07 31.43,86.99 32.7,85.72 U3.18
ESP32TX: length 56.2
  TOP w0.381: U1.7 68.26,84.83 68.26,90.17 66.99,91.44 32.86,91.44 32.07,90.65 32.07,87.95 33.02,86.99 U3.17
HUMIDITY_LED: length 19.2
  TOP w0.381: R17.2 58.79,68.68 50.63,76.83 U3.4
INPUT1A: length 36.2
  TOP w0.381: U3.25 28.89,76.83 28.26,76.2 28.26,70.48 26.35,68.58 16.51,68.58 13.02,72.07 U14.2
INPUT1B: length 36.5
  TOP w0.381: U3.22 29.53,80.64 28.89,81.28 28.89,92.07 26.99,93.98 22.7,93.98 21.91,93.19 U14.12
INPUT2A: length 27.6
  TOP w0.381: U3.24 28.26,78.1 26.99,76.83 26.99,71.12 25.72,69.85 22.7,69.85 21.91,70.64 U14.9
INPUT2B: length 45.7
  TOP w0.381: v1(12.22,91.6) 13.02,90.8 U14.19 ; U3.21 30.8,81.91 30.16,82.55 30.16,92.71 27.62,95.25 20.64,95.25 v1(19.69,94.3)
  BOTTOM w0.381: v1(19.69,94.3) 14.92,94.3 v1(12.22,91.6)
LED: length 25.1
  TOP w0.381: U3.7 50.56,80.64 63.98,67.23 R18.2
MCLR: length 46.4
  TOP w0.381: R1.1 54.93,44.61 56.2,45.88 56.2,52.7 53.66,55.24 53.66,67.03 51.44,69.25 ; 51.44,69.25 50.71,69.98 45.78,69.98 45.4,70.36 45.4,70.74 45.78,71.12 47.37,71.12 48.58,72.33 48.58,72.71 48.26,73.02 U3.1 ; 51.44,69.25 U10.1
PGC: length 17.3
  TOP w0.381: U10.5 41.28,66.99 39.69,68.58 35.88,68.58 34.61,69.85 34.61,73.91 34.99,74.29 U3.27
PGD: length 14.7
  TOP w0.381: U10.4 43.81,65.85 39.81,69.85 37.15,69.85 35.88,71.12 35.88,72.71 36.19,73.02 U3.28
SCL: length 131.8
  TOP w0.381: 66.99,80.01 66.99,88.9 65.72,90.17 49.21,90.17 48.58,89.53 U3.14 ; 66.99,80.01 v1(68.9,78.1) ; 66.99,80.01 66.99,68.58 67.94,67.63 67.94,64.93 ; U1.14 69.48,63.4 67.94,64.93 ; 67.94,64.93 67.94,49.09 65.37,46.51 62.23,46.51 60.64,44.93 R2.1 ; v1(53.98,49.37) 52.1,49.37 50.67,50.8 U13.5
  BOTTOM w0.381: v1(53.98,49.37) 54.77,50.16 61.91,50.16 67.79,56.04 67.79,65.88 63.5,70.17 63.5,72.71 v1(68.9,78.1)
SDA: length 136
  TOP w0.381: 65.72,75.56 63.18,73.02 63.18,69.85 66.36,66.67 66.36,48.89 65.09,47.62 61.12,47.62 57.79,44.29 R3.1 ; 65.72,75.56 65.72,73.02 65.09,72.39 v1(65.09,71.12) ; 65.72,75.56 65.72,80.01 ; v1(68.9,71.12) 70.35,71.12 70.45,71.02 U1.11 ; 65.72,80.01 65.72,88.26 65.09,88.9 49.85,88.9 49.21,88.26 U3.13 ; 65.72,80.01 v1(62.55,76.83) ; U13.6 v1(53.66,52.07)
  BOTTOM w0.381: v1(62.55,76.83) 62.55,69.85 66.99,65.4 66.99,56.36 61.75,51.12 55.88,51.12 54.93,52.07 v1(53.66,52.07) ; v1(68.9,71.12) v1(65.09,71.12)
STEP_LED: length 22.5
  TOP w0.381: R19.2 61.33,68.32 50.27,79.38 U3.6
XTRAGPIO: length 16
  TOP w0.381: J1.2 49.85,83.82 49.21,84.45 U3.10
XTRAGPIO1: length 12.2
  TOP w0.381: J2.2 56.83,84.84 56.45,84.45 50.48,84.45 49.21,85.72 U3.11
XTRAGPIO2: length 4.6
  TOP w0.381: U3.12 49.4,86.99 50.04,86.36 J3.2
N05422: length 3.5
  TOP w0.381: R19.1 D2.2
N05426: length 3.8
  TOP w0.889: D3.2 R20.1
N06741: length 2.5
  TOP w0.381: R18.1 D4.2
N07629: length 4.2
  TOP w0.889: F4.1 3.97,12.7 J5.1
N08087: length 2.6
  TOP w0.381: R10.1 56.25,60.43 55.99,60.17 D5.2
N08305: length 7.9
  TOP w0.381: R12.1 R11.2 26.12,34.29 U12.2
N08985: length 6.8
  TOP w0.889: 39.43,53.34 35.37,53.34 C12.2
N09403: length 4.7
  TOP w0.381: R17.1 D7.2
N39972: length 3.2
  TOP w0.889: D1.2 R22.1

## Copper pours and planes (outline as drawn; the poured copper is in the pictures)
GND on TOP: 99.06,0 99.06,99.06 0,99.06 0,0 ; 1 cut-out
GND on BOTTOM: 0,99.06 0,0 99.06,0 99.06,99.06 ; 1 cut-out

## Text on the board
TOP: EGR 314 Team 106
